# Altium PCB KSP_PCB.PcbDoc (part 2 of 2)
Units mm, origin at the board's own origin, x right, y up, seen from the top; angles counter-clockwise.
Board outline 121 x 121 mm, 2 copper layers (Top Layer, Bottom Layer), stack 1.571 mm thick; 210 components, 141 nets, 724 pads, 132 vias.
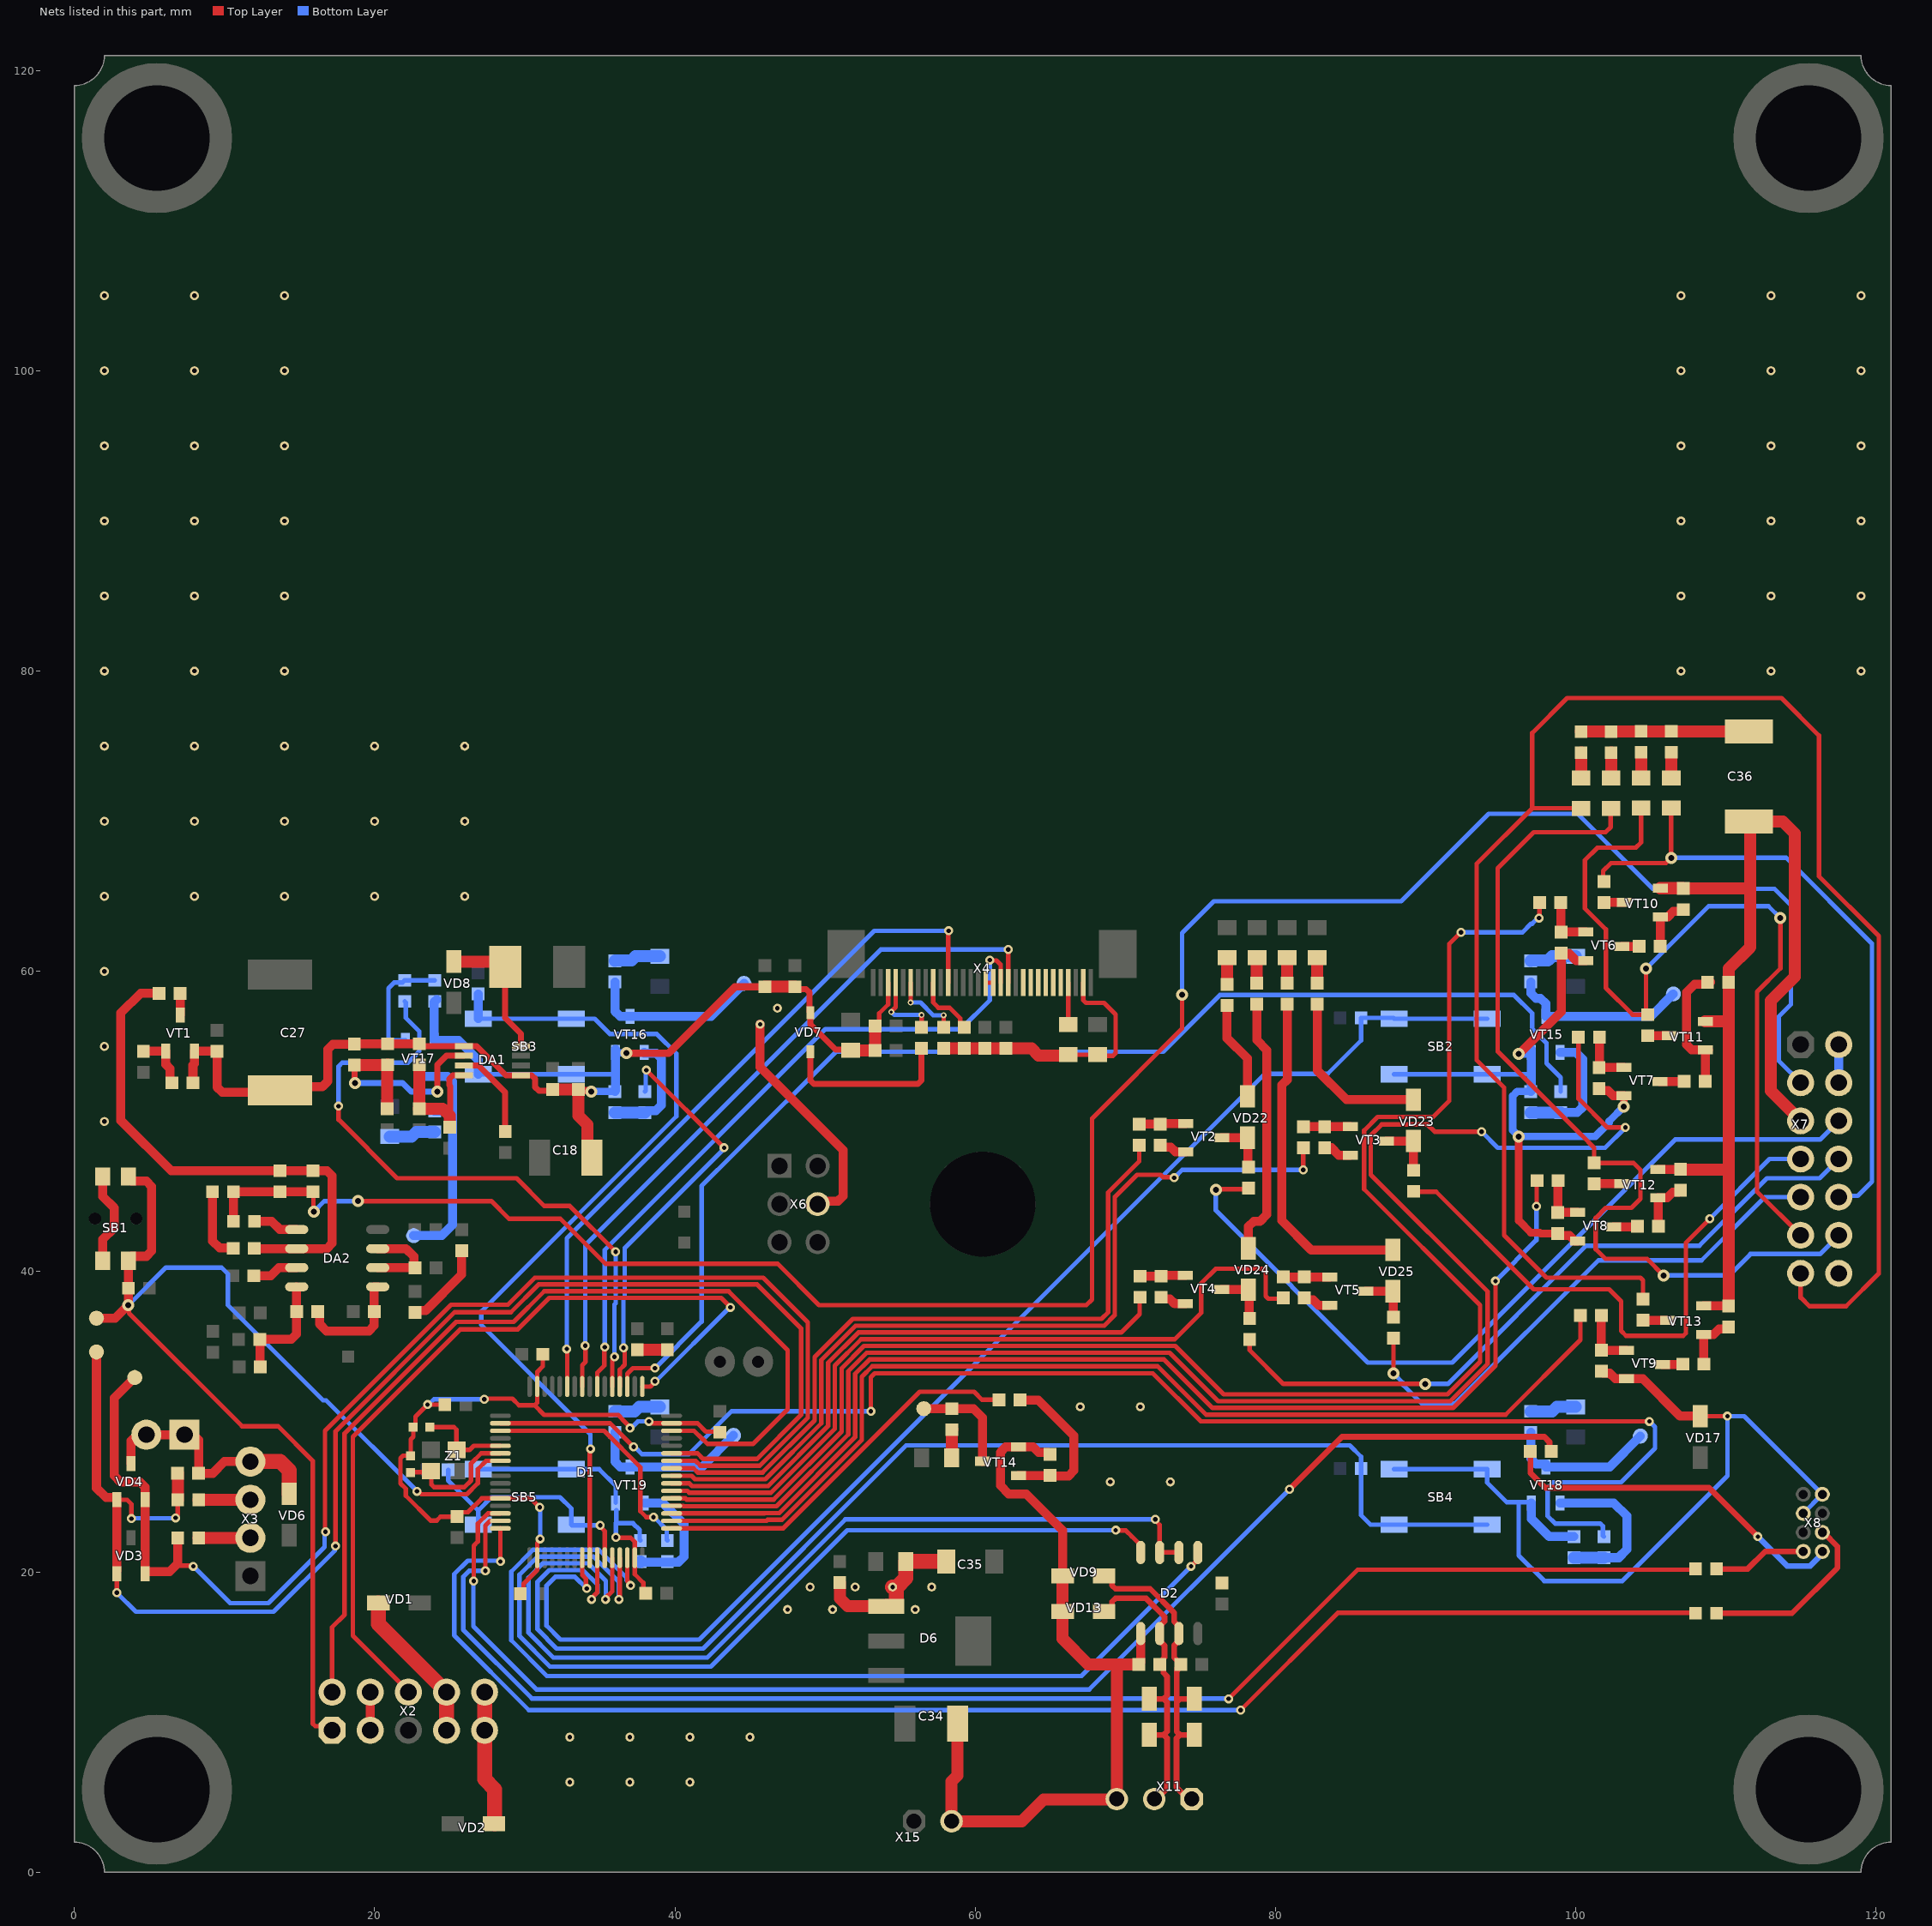
[diagram p2: the nets of this part, all layers, seen from the top]

## Via types
v1: diameter 0.6, hole 0.3, Top Layer to Bottom Layer, tented both sides, 85 vias
v2: diameter 0.8, hole 0.4, Top Layer to Bottom Layer, tented both sides, 42 vias
v3: diameter 0.4, hole 0.2, Top Layer to Bottom Layer, tented both sides, 4 vias
v4: diameter 0.6, hole 0.3, Top Layer to Bottom Layer, 1 vias

## Nets (pads, with @x,y where several pads share a name; then routed paths per layer and width w, separated by ;. In a path a pad name is that pad's centre, name@x,y a point inside that pad or via, vN(x,y) a via of type N, cw(c..) or ccw(c..) an arc to the next point about the centre after c; other vN are vias at no path point) (continued)
GND: C1.1 C2.1 C3.1 C4.1 C5.1 C6.1 C7.1 C8.1 C9.1 C10.1 C11.1 C12.1 C13.1 C14.1 C15.1 C16.1 C17.1 C18.2 C19.1 C20.1 C21.1 C22.1 C24.1 C25.1 C27.2 C28.1 C32.1 C33.1 C34.2 C35.2 C36.2 D1.12 D1.18 D1.31 D1.47 D1.63 D2.5 D6.1 DA1.1 DA1.5 DA2.4 pad.N@2,50 pad.N@2,55 pad.N@2,60 pad.N@2,65 pad.N@2,70 pad.N@2,75 pad.N@2,80 pad.N@2,85 pad.N@2,90 pad.N@2,95 pad.N@2,100 pad.N@2,105 pad.N@8,65 pad.N@8,70 pad.N@8,75 pad.N@8,80 pad.N@8,85 pad.N@8,90 pad.N@8,95 pad.N@8,100 pad.N@8,105 pad.N@14,65 pad.N@14,70 pad.N@14,75 pad.N@14,80 pad.N@14,85 pad.N@14,90 pad.N@14,95 pad.N@14,100 pad.N@14,105 pad.N@20,65 pad.N@20,70 pad.N@20,75 pad.N@26,65 pad.N@26,70 pad.N@26,75 pad.N@33,6 pad.N@33,9 pad.N@37,6 pad.N@37,9 pad.N@41,6 pad.N@41,9 pad.N@45,9 pad.N@45.675,56.475 pad.N@46.825,57.55 pad.N@47.5,17.5 pad.N@49,19 pad.N@50.5,17.5 pad.N@52,19 pad.N@54.5,19 pad.N@56,17.5 pad.N@57.1,19 pad.N@67,31 pad.N@69,26 pad.N@71,31 pad.N@73,26 pad.N@107,80 pad.N@107,85 pad.N@107,90 pad.N@107,95 pad.N@107,100 pad.N@107,105 pad.N@113,80 pad.N@113,85 pad.N@113,90 pad.N@113,95 pad.N@113,100 pad.N@113,105 pad.N@119,80 pad.N@119,85 pad.N@119,90 pad.N@119,95 pad.N@119,100 pad.N@119,105 R1.1 R4.2 R7.1 R8.1 R10.1 R12.2 R16.2 R17.1 R22.2 R23.2 R24.2 R26.2 R31.2 R43.2 R62.1 R63.1 R64.1 R65.1 R74.1 R75.1 R76.1 R77.1 R95.1 R100.1 R101.1 R111.1 R112.1 R113.1 SB1.2 SB2.2 SB3.2 SB4.2 SB5.2 VD4.3 VD6.1 VD7.2 VD9.1 VD13.1 VD17.1 VD26.2 VD27.2 VD28.2 VD29.2 VT1.3 VT2.3 VT3.3 VT4.3 VT5.3 VT6.3 VT7.3 VT8.3 VT9.3 VT14.3 VT15.3 VT16.3 VT17.3 VT18.3 VT19.3 X2.3 X2.4 X3.4 X4.2 X4.5 X4.6 X4.7 X4.8 X4.9 X4.10 X4.14 X4.15 X4.28 X5.1 X5.2 X6.4 X7.2 X7.4 X7.14 X8.2 X8.3 X11.3 X15.2 | length 429.8
  Top Layer w0.3: C1.1@22.4,27.725 22.375,27.75 21.901,27.75 21.725,27.574 21.725,25.9 22.075,25.55 22.075,25.075 23.725,23.425 24.137,23.425 24.387,23.675 25.625,23.675 25.625,23.825 25.775,23.975 26.214,23.975 27.139,24.9 D1.12@28.375,24.9 30.398,24.9 30.998,24.3 v1(31,24.3) ; C1.1@22.4,27.84 22.4,28.825 22.575,29 C4.1@22.575,29.65 22.725,29.8 22.725,30.35 v1(23.525,31.15) C8.1@24.675,31.15 ; v1(27.3,31.5) 27.35,31.55 29.165,31.55 29.615,31.1 30.649,31.1 ; C7.1@29.699,18.549 29.917,18.767 29.917,19.217 30.825,20.125 D1.18@30.825,20.95 30.825,21.919 31.025,22.119 v1(31.025,22.2) ; C3.1@31.2,34.5 31.2,33.7 30.825,33.325 D1.63@30.825,32.35 30.825,31.276 30.649,31.1 ; v4@36.1,22.25 36.132,22.282 37.042,22.282 37.325,21.999 D1.31@37.325,20.95 37.325,20.099 37.325,19.85 37.901,19.274 37.901,18.724 C6.1@38.05,18.575 ; v1(37,29.575) 37,29.656 36.518,30.138 36.518,30.157 36.221,30.454 31.295,30.454 30.649,31.1 ; v1(38.275,30.025) 38.356,30.025 38.481,29.9 D1.47@39.775,29.9 41.501,29.9 42.051,29.35 42.95,29.35 C5.1@43,29.3 ; C10.1@51.7,54.75 C10.1@51.725,54.725 ; C14.1@53.325,56.35 53.6,56.625 53.6,57.2 54.2,57.8 X4.28@54.2,59.25 ; X4.15@60.7,59.25 X4.14@61.2,59.25 ; C12.1@66.2,54.45 C11.1@68.15,54.45 68.225,54.375 69.174,54.375 69.35,54.551 69.35,57.125 68.575,57.9 67.376,57.9 67.2,58.076 X4.2@67.2,59.25 ; VD17.1@108.275,30.375 v1(110.1,30.375)
  Top Layer w0.4: R26.2@22.975,55.175 23.125,55.025 DA1.1@25.95,55.025 26.8,55.025 28.75,53.075 DA1.5@29.75,53.075 30.466,53.075 30.7,52.841 30.7,52.284 30.934,52.05 31.825,52.05 C24.1@31.85,52.075 ; C16.1@48,58.975 48.158,58.817 48.741,58.817 48.975,58.583 48.975,57.3 VD7.2@49.025,57.25 49.025,56.475 50.25,55.25 50.709,54.791 51.659,54.791 C10.1@51.7,54.75
  Top Layer w0.5: C20.1@33.575,52.05 33.582,52.057 34.368,52.057 v2(34.425,52) ; v2(36.775,54.55) 39.575,54.55 44,58.975 C17.1@46,58.975 ; v2(96.2,49) 96.2,43.4 97,42.6 97.6,42.6 97.66,42.54 R76.1@98.8,42.54 ; v2(103.2,51) VT7.3@103.2,51.715
  Top Layer w0.6: SB1.2@1.9,40.725 1.9,42.15 2.65,42.9 2.65,44.25 1.9,45 SB1.2@1.9,46.325 ; VD4.3@3.777,27.206 3.777,28.718 X5.2@4.2,29.141 ; X5.2@4.796,29.141 4.797,29.139 7.334,29.139 X5.1@7.336,29.141 ; X5.1@7.336,29.141 X5.1@7.336,29.141 ; R17.1@7.9,52.575 7.9,53.75 8,53.85 VT1.3@8,54.675 C22.1@9.5,54.675 9.5,52.301 9.851,51.95 13.575,51.95 C27.2@13.7,52.075 13.95,52.325 16.524,52.325 16.875,52.676 16.875,54.799 17.226,55.15 R12.2@18.65,55.15 18.662,55.163 20.862,55.163 C19.1@20.875,55.175 R26.2@22.975,55.175 ; R4.2@8.275,26.575 R4.2@8.283,26.575 ; C25.1@9.2,45.25 9.2,42.05 9.676,41.574 10.501,41.574 R16.2@10.575,41.5 ; X3.4@11.725,27.351 11.717,27.358 10.008,27.358 9.225,26.575 R4.2@8.283,26.575 ; R23.2@12.375,33.65 12.36,33.665 12.36,35.475 R24.2@12.344,35.491 14.449,35.491 14.8,35.842 R22.2@14.8,37.35 ; R22.2@14.7,37.375 14.808,37.483 DA2.4@14.808,38.994 ; X2.3@19.705,9.46 X2.4@19.705,12 ; C21.1@22.7,37.275 22.825,37.4 23.4,37.4 25.8,39.8 R31.2@25.8,41.4 ; pad.N@45.675,56.475 45.675,53.625 51.2,48.1 51.2,45.043 50.849,44.691 49.691,44.691 X6.4@49.5,44.5 ; R95.1@64.975,27.825 64.85,27.95 64.225,27.95 63.85,28.325 VT14.3@62.875,28.325 62.026,28.325 61.675,27.974 61.675,25.75 62.225,25.2 63.4,25.2 65.825,22.775 VD9.1@65.825,19.75 ; R43.2@70.9,13.85 71.025,13.975 71.025,14.85 71.02,15.005 D2.5@71.02,15.9 ; R62.1@72.325,48.425 72.45,48.3 73.025,48.3 73.35,47.975 VT2.3@74.025,47.975 ; R64.1@72.375,38.3 72.5,38.175 72.975,38.175 73.293,37.857 VT4.3@74.006,37.857 ; R65.1@81.925,38.25 81.951,38.276 81.951,38.224 82.05,38.125 82.5,38.125 82.875,37.75 VT5.3@83.625,37.75 ; R63.1@83.275,48.25 83.724,48.25 84.224,47.75 VT3.3@84.975,47.75 ; v2(96.2,54.5) 99.025,57.325 99.025,61.165 99.05,61.19 99.549,61.19 100.024,60.715 VT6.3@100.675,60.715 ; R76.1@98.8,42.54 98.925,42.415 99.574,42.415 99.925,42.064 99.925,42.04 VT8.3@100.125,42.04 ; R75.1@101.55,52.19 101.675,52.065 102.15,52.065 102.5,51.715 VT7.3@103.2,51.715 ; R77.1@101.7,33.365 101.825,33.24 102.25,33.24 102.625,32.865 VT9.3@103.375,32.865 104.46,32.865 106.95,30.375 VD17.1@108.275,30.375 ; X5.1@7.336,29.141 7.932,29.141 8.283,28.789 R4.2@8.283,26.575
  Top Layer w0.8: C24.1@31.85,52.125 C20.1@33.575,52.125 ; C20.1@33.575,52.05 33.575,50.4 34.175,49.8 34.175,47.9 C18.2@34.475,47.6 ; R1.1@37.5,34.8 C9.1@39.5,34.8 ; C17.1@46,58.975 C16.1@47.999,58.975 ; C33.1@50.975,19.3 51,19.275 51,18.225 51.5,17.725 54.05,17.725 D6.1@54.075,17.7 ; C10.1@51.725,54.725 C15.1@53.325,54.725 C14.1@53.325,56.35 ; C13.1@57.9,54.875 R7.1@62.05,54.875 63.75,54.875 64.225,54.4 66.15,54.4 C12.1@66.2,54.45 ; C34.2@58.825,9.9 58.825,6.431 58.425,6.031 X15.2@58.425,3.4 63.1,3.4 64.55,4.85 69.4,4.85 X11.3@69.425,4.875 69.425,13.85 ; VD9.1@65.825,19.75 VD13.1@65.825,17.375 65.825,15.55 67.525,13.85 69.425,13.85 ; R43.2@70.9,13.85 69.425,13.85 ; VD29.2@100.35,75.99 VD27.2@104.35,75.99 VD26.2@106.35,75.99 C36.2@110.8,75.99
  Top Layer w1: X3.4@11.725,27.351 13.714,27.351 14.3,26.765 VD6.1@14.3,25.2 ; D6.1@54.075,17.7 54.748,17.7 pad.N@54.748,18.848 ; pad.N@54.5,19 54.789,19 55.375,19.586 C32.1@55.375,20.7 C35.2@58.075,20.7
  Bottom Layer w0.3: v1(23.525,31.15) 23.606,31.15 23.956,31.5 v1(27.3,31.5) ; SB5.2@26.9,26.85 SB5.2@33.1,26.85 34.95,26.85 36.05,25.75 VT19.3@36.05,24.6 ; SB3.2@26.9,53.15 SB3.2@33.1,53.15 35.875,53.15 36.05,53.325 ; v1(31,24.3) 31.025,24.275 v1(31.025,22.2) ; v4(36.075,22.3) 36.075,23.244 37.206,23.244 37.651,22.799 37.651,22.149 R113.1@37.7,22.1 ; 36.1,23.194 VT19.3@36.1,24.116 ; v1(37,29.575) 37.081,29.575 37.531,30.025 v1(38.275,30.025) ; SB4.2@87.9,26.85 SB4.2@94.1,26.85 94.1,25.95 95.4,24.65 96.2,24.65 ; SB2.2@87.9,53.15 SB2.2@94.1,53.15 97,53.15 97.05,53.1 ; VT18.3@97.05,24.6 97,24.65 96.2,24.65 ; X8.3@115.15,23.905 X8.2@116.42,25.175 115.22,26.375 111.22,30.375 v1(110.1,30.375) 110.1,26.4 103.1,19.4 97.9,19.4 96.2,21.1 96.2,24.65
  Bottom Layer w0.5: v2(34.425,52) R101.1@36,52 ; VT16.3@36.05,54.6 36.075,54.575 36.75,54.575 v2(36.775,54.55) ; R100.1@97,52 96.093,52 95.8,51.707 95.8,49.4 v2(96.2,49) 101.3,49 102.221,49.921 102.221,50.021 v2(103.2,51)
  Bottom Layer w0.6: R111.1@24.125,58.125 R111.1@24,58 23.95,57.95 VT17.3@23.95,55.4 25.6,55.4 26.9,54.1 SB3.2@26.9,53.15 ; R101.1@36,52 36.05,52.05 36.05,53.325 VT16.3@36.05,54.6 VT16.3@36.05,54.8 ; v2(96.2,54.5) 96.238,54.538 VT15.3@97.05,54.538 ; R100.1@97,52 97.05,52.05 97.05,53.1 VT15.3@97.05,54.538 ; VT18.3@97.05,24.6 97.05,23.525 98.225,22.35 R112.1@99.874,22.35 ; VT15.3@97.05,54.8 VT15.3@97.05,54.6 VT15.3@97.05,54.538 ; X7.4@117.515,52.585 X7.2@117.515,55.125
IREF: R10.2 X4.22 | length 4.3
  Top Layer w0.3: X4.22@57.2,59.25 57.2,57.925 57.55,57.575 58.3,57.575 59,56.875 59,56.55 R10.2@59.275,56.275
KEY1: D1.24 R114.1 SB2.1 | length 89.2
  Top Layer w0.3: D1.24@33.825,20.95 33.825,19.8 34.068,19.557 34.068,18.957 v1(34.125,18.9)
  Bottom Layer w0.3: v1(34.125,18.9) 33.35,19.675 32.025,19.675 31.45,19.1 31.45,16.425 32.375,15.5 41.625,15.5 79.3,53.175 83.475,53.175 85.7,55.4 R114.1@85.7,56.9 87.85,56.9 SB2.1@87.9,56.85 SB2.1@94.1,56.85
KEY2: D1.25 R115.1 SB3.1 | length 57.8
  Top Layer w0.3: D1.25@34.325,20.95 34.325,28.15 v1(34.375,28.2)
  Bottom Layer w0.3: SB3.1@26.9,56.85 34.65,56.85 35.675,55.825 38.8,55.825 40.1,54.525 40.1,50.35 27.1,37.35 27.1,36.45 34.375,29.175 v1(34.375,28.2)
  Bottom Layer w0.6: SB3.1@26.9,56.85 R115.1@26.9,58.5
KEY3: D1.26 R116.1 SB4.1 | length 85.8
  Top Layer w0.3: v1(34.45,18.175) 34.45,18.256 34.825,18.631 D1.26@34.825,20.95
  Bottom Layer w0.3: v1(34.45,18.175) 34.45,18.251 34.85,18.651 34.85,19.15 33.875,20.125 31.625,20.125 30.85,19.35 30.85,16.175 32.125,14.9 41.875,14.9 55.4,28.425 84.95,28.425 85.7,27.675 R116.1@85.7,26.9 85.7,23.775 86.325,23.15 SB4.1@87.9,23.15 SB4.1@94.1,23.15
KEY4: D1.27 R117.1 SB5.1 | length 16.7
  Top Layer w0.3: v1(35.025,23.1) 35.025,23.019 35.325,22.719 D1.27@35.325,20.95
  Bottom Layer w0.3: R117.1@24.9,26.8 24.9,26.099 26.9,24.099 27.776,24.975 32.35,24.975 33.1,24.225 SB5.1@33.1,23.15 33.15,23.1 v1(35.025,23.1) ; SB5.1@26.9,23.15 26.9,24.175
KEY_LED1: D1.51 R98.2 | length 83.4
  Top Layer w0.3: D1.51@36.825,32.35 36.825,33.199 37.201,33.575 v1(38.675,33.575)
  Bottom Layer w0.3: v1(38.675,33.575) 41.775,36.675 41.775,45.7 44.025,47.95 50.725,54.65 72.525,54.65 76.3,58.425 95.875,58.425 97.1,57.2 97.1,56.175 97.375,55.9 98.05,55.225 98.05,53.875 99,52.925 R98.2@99,52
KEY_LED2: D1.52 R99.2 | length 27.6
  Top Layer w0.3: D1.52@36.325,32.35 36.325,33.475 36.65,33.8 36.65,34.725 36.632,34.743 36.632,34.868 v1(36.575,34.925) ; v1(38.1,53.425) v1(43.275,48.25)
  Bottom Layer w0.3: v1(36.575,34.925) 36.575,38.253 36.65,38.328 36.65,41.575 43.275,48.2 v1(43.275,48.25) ; R99.2@38,52 38.05,52.05 38.05,53.375 v1(38.1,53.425)
KEY_LED3: D1.53 R108.2 | length 44.2
  Top Layer w0.3: v1(17.6,51.025) 17.6,50.125 21.5,46.225 29.45,46.225 31.3,44.375 33,44.375 v1(36.05,41.325) ; D1.53@35.825,32.35 35.825,34.094 35.975,34.244 v1(35.975,34.325)
  Bottom Layer w0.3: v1(17.6,51.025) 17.6,53.674 17.851,53.925 22.225,53.925 22.975,54.675 22.975,56 22.076,56.899 22.076,57.924 R108.2@22,58 ; v1(35.975,34.325) 35.975,37.816 36.05,37.891 v1(36.05,41.325)
KEY_LED4: D1.2 R109.2 | length 99
  Top Layer w0.3: D1.2@28.375,29.9 35.675,29.9 v1(37.25,28.325) ; v1(53.05,30.7) 53.05,32.963 53.312,33.225 71.825,33.225 75.025,30.025 v1(104.9,30.025)
  Bottom Layer w0.3: v1(37.25,28.325) 37.331,28.325 37.806,27.85 40.925,27.85 43.775,30.7 v1(53.05,30.7) ; R109.2@101.874,22.35 101.801,22.423 101.801,23.049 101.625,23.225 98.625,23.225 98.125,23.725 98.125,25.6 98.5,25.975 103.025,25.975 105.275,28.225 105.275,29.65 v1(104.9,30.025)
KEY_LED5: D1.3 R110.2 | length 16.3
  Top Layer w0.3: D1.3@28.375,29.4 35.275,29.4 37.7,26.975 37.7,24.05 38.1,23.65 v1(38.575,23.65) v1@38.61,23.65
  Bottom Layer w0.3: v1(38.575,23.65) 38.61,23.65 39.46,22.799 39.46,22.14 R110.2@39.5,22.1
LCD_RES: D1.59 X4.20 | length 47.3
  Top Layer w0.3: v1(32.8,34.85) 32.825,34.825 D1.59@32.825,32.35 ; X4.20@58.2,59.25 58.2,62.675 v1(58.225,62.7)
  Bottom Layer w0.3: v1(32.8,34.85) 32.8,42.225 53.275,62.7 v1(58.225,62.7)
LED: D1.33 R94.2 | length 25.8
  Top Layer w0.3: D1.33@39.775,22.9 47.2,22.9 56.3,32 59.925,32 60.45,31.475 61.55,31.475 R94.2@61.575,31.45
LINE_A: D1.14 R102.2 | length 90
  Top Layer w0.3: v1(26.6,19.4) 26.6,21.75 26.875,22.025 26.875,23.223 27.552,23.9 D1.14@28.375,23.9
  Top Layer w0.4: v1(80.925,25.5) 84.425,29 97.899,29 98.25,28.649 98.25,28.15 R102.2@98.375,28.025
  Bottom Layer w0.3: v1(26.6,19.4) 26.575,19.375 26.575,16.375 30.775,12.175 67.6,12.175 v1(80.925,25.5)
LINE_A_P: R102.1 X8.8 | length 23.9
  Top Layer w0.381: R102.1@96.975,28.025 96.975,26.6 97.975,25.6 108.875,25.6 v1(112.125,22.35)
  Bottom Layer w0.381: v1(112.125,22.35) 114.075,20.4 115.623,20.4 116.42,21.197 X8.8@116.42,21.365
LINE_B: D1.15 R103.2 | length 97
  Top Layer w0.3: v1(27.375,20.075) 27.375,23.086 27.689,23.4 D1.15@28.375,23.4 ; v1(76.875,11.55) 85.475,20.15 R103.2@108.11,20.15
  Bottom Layer w0.3: v1(27.375,20.075) 26.3,20.075 25.9,19.675 25.9,16.15 30.475,11.575 76.85,11.575 v1(76.875,11.55)
LINE_B_P: R103.1 X8.7 | length 6.3
  Top Layer w0.381: R103.1@109.375,20.2 111.452,20.2 112.617,21.365 X8.7@115.15,21.365
LINE_Z: D1.16 R104.2 | length 97.3
  Top Layer w0.3: v1(28.375,20.7) D1.16@28.375,22.9 ; v1(77.675,10.8) 84.15,17.275 R104.2@108.096,17.275
  Bottom Layer w0.3: v1(28.375,20.7) 28.325,20.75 26.2,20.75 25.3,19.85 25.3,15.775 30.275,10.8 v1(77.675,10.8)
LINE_Z_P: R104.1 X8.6 | length 12.1
  Top Layer w0.381: R104.1@109.431,17.25 114.4,17.25 117.425,20.275 117.425,21.7 116.49,22.635 X8.6@116.42,22.635
MODBUS_N: D2.6 R38.1 R43.1 R50.1 VD13.2 X11.2 | length 20.6
  Top Layer w0.381: VD13.2@68.575,17.375 68.803,17.375 69.113,17.685 69.113,18.022 69.336,18.245 71.386,18.245 72.608,17.023 72.608,16.708 72.29,16.39 D2.6@72.29,15.9 72.29,15.41 72.608,15.092 72.608,14.308 72.535,14.235 72.535,14.084 R43.1@72.3,13.85 72.535,13.615 72.535,13.29 72.782,13.043 72.782,11.773 72.559,11.55 ; R38.1@71.6,9.15 72.559,9.15 ; R50.1@71.6,11.55 72.559,11.55 ; X11.2@71.925,4.875 72.072,4.875 72.775,5.578 72.775,8.934 72.559,9.15 ; 72.559,9.15 72.782,9.373 72.782,11.327 72.559,11.55
MODBUS_P: D2.7 R38.2 R42.1 R50.2 VD9.2 X11.1 | length 21.9
  Top Layer w0.381: VD9.2@68.575,19.75 68.803,19.75 69.113,19.441 69.113,19.103 69.336,18.88 71.649,18.88 73.243,17.286 73.243,16.708 73.56,16.39 D2.7@73.56,15.9 73.56,15.41 73.243,15.092 73.243,14.307 R42.1@73.7,13.85 73.466,13.615 73.466,13.44 73.417,13.392 73.417,11.327 ; X11.1@74.425,4.875 74.178,4.875 73.41,5.643 73.41,8.927 73.633,9.15 73.641,9.15 ; R38.2@74.6,9.15 73.641,9.15 ; R50.2@74.6,11.55 73.641,11.55 73.417,11.327 ; 73.417,11.327 73.417,9.373 73.641,9.15
MODBUS_RX: D1.30 D2.1 | length 66.6
  Top Layer w0.3: D1.30@36.825,20.95 36.825,19.406 37.05,19.181 v1(37.05,19.1) ; v1(74.375,20.375) 74.377,20.375 74.83,20.828 D2.1@74.83,21.3
  Bottom Layer w0.3: v1(37.05,19.1) 37.05,19.181 36.775,19.456 36.775,19.625 34.925,21.475 30.55,21.475 29.1,20.025 29.1,15.45 31.475,13.075 67.075,13.075 v1(74.375,20.375)
MODBUS_TRE: D1.28 D2.2 D2.3 | length 63.7
  Top Layer w0.3: v1(35.375,18.175) 35.375,18.256 35.825,18.706 D1.28@35.825,20.95 ; v1(72,23.5) 72,23.419 72.282,23.136 72.282,21.308 D2.3@72.29,21.3 D2.2@73.56,21.3
  Bottom Layer w0.3: v1(35.375,18.175) 35.4,18.2 35.4,19.4 34.225,20.575 31.2,20.575 30.25,19.625 30.25,15.95 31.9,14.3 42.15,14.3 51.35,23.5 v1(72,23.5)
MODBUS_TX: D1.29 D2.4 | length 62.7
  Top Layer w0.3: v1(36.275,18.175) 36.325,18.225 D1.29@36.325,20.95 ; v1(69.355,22.779) 69.377,22.758 70.037,22.758 70.425,22.37 71.02,21.775 D2.4@71.02,21.3
  Bottom Layer w0.3: v1(36.275,18.175) 36.275,19.325 34.575,21.025 30.85,21.025 29.65,19.825 29.65,15.725 31.675,13.7 42.4,13.7 51.479,22.779 v1(69.355,22.779)
MOSI: D1.57 X4.12 | length 48.1
  Top Layer w0.3: D1.57@33.825,32.35 33.825,33.775 34.05,34 34.05,35.05 v1(34.025,35.075) ; X4.12@62.2,59.25 v1(62.2,61.45)
  Bottom Layer w0.3: v1(34.025,35.075) 34.025,41.775 53.7,61.45 v1(62.2,61.45)
NetC1_2: C1.2 D1.6 Z1.3 | length 8.6
  Top Layer w0.3: C1.2@22.4,26.65 22.475,26.65 23.6,26.65 23.675,26.65 Z1.3@23.75,26.725 23.775,26.7 23.775,25.826 23.951,25.65 25.978,25.65 26.425,26.097 26.425,27.225 27.1,27.9 D1.6@28.375,27.9
NetC4_2: C4.2 D1.5 Z1.1 | length 6.2
  Top Layer w0.3: C4.2@23.675,29.65 25.274,29.65 25.45,29.474 Z1.1@25.45,28.125 26.325,28.125 26.6,28.4 D1.5@28.375,28.4
NetC19_2: C19.2 DA1.2 R11.2 R12.1 | length 15.9
  Top Layer w0.4: R12.1@18.65,53.75 18.675,53.725 18.675,52.575 v2(18.7,52.55) ; v2(24.175,52) 24.175,53.775 24.775,54.375 DA1.2@25.95,54.375
  Top Layer w0.8: R12.1@18.65,53.75 18.662,53.763 20.862,53.763 C19.2@20.875,53.775 ; R11.2@20.825,50.85 20.825,53.725 C19.2@20.85,53.75
  Bottom Layer w0.4: v2(18.7,52.55) 21.875,52.55 22.425,52 v2(24.175,52)
NetC23_2: C23.2 DA2.2 R16.1 R19.1 R20.2 | length 35.6
  Top Layer w0.6: R19.1@5.65,58.525 5.625,58.55 4.425,58.55 3.1,57.225 3.1,50.075 6.45,46.725 C23.2@15.869,46.725 ; R16.1@12.009,41.534 DA2.2@14.808,41.534 16.824,41.534 17.175,41.885 17.175,46.374 16.824,46.725 C23.2@15.9,46.725
NetC26_1: C26.1 DA1.4 R25.2 R26.1 | length 10.2
  Top Layer w0.4: C26.1@25,49.625 25.025,49.65 25.025,52.375 24.975,52.425 24.975,52.841 25.209,53.075 DA1.4@25.95,53.075
  Top Layer w0.8: R25.2@22.95,50.85 24.531,50.85 25,50.381 C26.1@25,49.625 ; R25.2@22.95,50.875 22.975,50.875 R26.1@22.975,53.775
NetDA1_3: DA1.3 R18.2 | length 6.1
  Top Layer w0.4: DA1.3@25.95,53.725 26.925,53.725 28.7,51.95 R18.2@28.7,49.325
NetDA1_8: DA1.8 L1.1 VD8.1 | length 9.3
  Top Layer w0.4: L1.1@28.7,60.3 28.7,56.9 29.75,55.85 DA1.8@29.75,55.025
  Top Layer w0.8: VD8.1@25.275,60.65 28.35,60.65 L1.1@28.7,60.3
NetDA2_1: DA2.1 R21.2 | length 3
  Top Layer w0.6: R21.2@12,43.35 13.15,43.35 13.696,42.804 DA2.1@14.808,42.804
NetDA2_3: DA2.3 R15.1 | length 3.1
  Top Layer w0.6: R15.1@11.95,39.725 13.075,39.725 13.614,40.264 DA2.3@14.808,40.264
NetDA2_5: DA2.5 R22.1 R27.2 | length 7.7
  Top Layer w0.6: R22.1@16.2,37.35 16.325,37.225 16.325,36.525 16.8,36.05 19.624,36.05 19.975,36.401 R27.2@19.975,37.35 19.975,38.994 DA2.5@20.208,38.994
NetDA2_6: DA2.6 DA2.7 R14.2 | length 5.8
  Top Layer w0.6: DA2.6@20.208,40.264 22.614,40.264 22.625,40.275 22.625,41 22.091,41.534 DA2.7@20.208,41.534 ; R14.2@22.65,40.3 R14.2@22.675,40.325
NetR3_1: R3.1 VD5.1 | length 1.9
  Top Layer w0.8: R3.1@58.425,27.6 58.45,27.625 58.45,29.45 VD5.1@58.475,29.475
NetR5_1: R5.1 X3.3 | length 3.4
  Top Layer w0.8: R5.1@8.283,24.806 8.285,24.808 11.722,24.808 X3.3@11.725,24.811
NetR6_1: R6.1 X3.2 | length 3.4
  Top Layer w0.8: R6.1@8.283,22.266 8.285,22.268 11.722,22.268 X3.2@11.725,22.271
NetR9_1: R9.1 VD7.1 | length 11.7
  Top Layer w0.4: VD7.1@49.025,54.65 49.025,52.734 49.259,52.5 56.191,52.5 56.425,52.734 R9.1@56.425,54.875
NetR13_1: R13.1 R17.2 VT1.1 | length 3.8
  Top Layer w0.6: R13.1@4.6,54.675 VT1.1@6.1,54.675 6.1,53.8 6.375,53.525 6.375,52.7 R17.2@6.5,52.575
NetR19_2: R19.2 VT1.2 | length 1.4
  Top Layer w0.6: VT1.2@7.05,57.075 R19.2@7.05,58.525
NetR54_1: R54.1 VD18.1 | length 1.8
  Top Layer w0.8: VD18.1@76.775,59.125 R54.1@76.775,60.925
NetR55_1: R55.1 VD19.1 | length 1.7
  Top Layer w0.8: VD19.1@82.775,59.225 R55.1@82.775,60.925
NetR56_1: R56.1 VD20.1 | length 1.7
  Top Layer w0.8: VD20.1@78.75,59.225 R56.1@78.75,60.925
NetR57_1: R57.1 VD21.1 | length 1.7
  Top Layer w0.8: VD21.1@80.775,59.225 R57.1@80.775,60.925
NetR58_1: R58.1 R62.2 VT2.1 | length 3.1
  Top Layer w0.6: R58.1@70.925,49.825 R62.2@72.325,49.825 72.375,49.875 VT2.1@74.025,49.875
NetR59_1: R59.1 R63.2 VT3.1 | length 3.1
  Top Layer w0.6: R59.1@81.85,49.65 R63.2@83.275,49.65 84.775,49.65 VT3.1@84.975,49.65
NetR60_1: R60.1 R64.2 VT4.1 | length 3.1
  Top Layer w0.6: R60.1@70.975,39.7 R64.2@72.375,39.7 72.432,39.757 VT4.1@74.006,39.757
NetR61_1: R61.1 R65.2 VT5.1 | length 3.1
  Top Layer w0.6: R61.1@80.525,39.65 R65.2@81.925,39.65 83.425,39.65 VT5.1@83.625,39.65
NetR66_2: R66.2 VD22.2 VT2.2 | length 3.7
  Top Layer w0.6: VT2.2@76.425,48.925 VD22.2@78.125,48.925 78.163,48.888 78.163,47.012 R66.2@78.2,46.975
NetR67_2: R67.2 VD23.2 VT3.2 | length 3.8
  Top Layer w0.6: VT3.2@87.375,48.7 VD23.2@89.175,48.7 89.188,48.688 89.188,46.762 R67.2@89.2,46.75
NetR68_2: R68.2 VD24.2 VT4.2 | length 3.8
  Top Layer w0.6: VT4.2@76.406,38.807 78.193,38.807 VD24.2@78.2,38.8 78.238,38.763 78.238,36.913 R68.2@78.275,36.875
NetR69_2: R69.2 VD25.2 VT5.2 | length 3.5
  Top Layer w0.6: VT5.2@86.025,38.7 VD25.2@87.825,38.7 87.838,38.688 87.838,36.988 R69.2@87.85,36.975
NetR70_1: R70.1 R74.2 VT6.1 | length 3.6
  Top Layer w0.6: R74.2@99,62.563 R70.1@99,64.538 ; R74.2@99.025,62.615 100.475,62.615 VT6.1@100.675,62.615
NetR71_1: R71.1 R75.2 VT7.1 | length 3.6
  Top Layer w0.6: R71.1@101.575,55.615 101.575,53.615 VT7.1@103.2,53.615
NetR72_1: R72.1 R76.2 VT8.1 | length 3.5
  Top Layer w0.6: R72.1@98.825,46.065 98.812,46.053 98.812,43.953 R76.2@98.8,43.94 99.925,43.94 VT8.1@100.125,43.94
NetR73_1: R73.1 R77.2 VT9.1 | length 4
  Top Layer w0.6: R73.1@101.7,37.09 R77.2@101.7,34.765 103.175,34.765 VT9.1@103.375,34.765
NetR78_1: R78.1 R82.2 VT10.1 | length 3.7
  Top Layer w0.6: R78.1@105.625,61.665 VT10.1@105.625,63.64 106.149,63.64 106.5,63.991 107.026,63.991 R82.2@107.15,64.115
NetR78_2: R78.2 VT6.2 | length 1.1
  Top Layer w0.6: VT6.2@103.075,61.665 R78.2@104.225,61.665
NetR79_1: R79.1 R83.2 VT11.1 | length 9.1
  Top Layer w0.6: R79.1@108.625,52.665 VT11.1@108.625,54.765 ; VT11.1@108.825,54.789 108.825,54.765 VT11.1@108.625,54.765 ; R83.2@108.975,59.275 108.85,59.15 107.925,59.15 107.375,58.6 107.375,55.116 107.726,54.765 VT11.1@108.625,54.765
NetR79_2: R79.2 VT7.2 | length 1.6
  Top Layer w0.6: VT7.2@105.6,52.665 R79.2@107.225,52.665
NetR80_1: R80.1 R84.2 VT12.1 | length 3.6
  Top Layer w0.6: VT12.1@105.475,44.915 VT12.1@105.487,44.915 ; R80.1@105.5,43.015 105.487,43.028 VT12.1@105.487,44.915 ; R84.2@106.975,45.415 106.85,45.29 106.462,45.29 106.087,44.915 VT12.1@105.487,44.915
NetR80_2: R80.2 VT8.2 | length 1.6
  Top Layer w0.6: VT8.2@102.525,42.99 R80.2@104.075,42.99
NetR81_1: R81.1 R85.2 VT13.1 | length 3.8
  Top Layer w0.6: R81.1@108.525,33.84 VT13.1@108.525,35.815 109.174,35.815 109.549,36.19 110.05,36.19 R85.2@110.175,36.315
NetR81_2: R81.2 VT9.2 | length 1.4
  Top Layer w0.6: VT9.2@105.775,33.815 106.151,33.815 106.164,33.802 107.087,33.802 R81.2@107.125,33.84
NetR86_2: R86.2 VT10.2 | length 1.4
  Top Layer w0.6: R86.2@101.875,64.59 VT10.2@103.225,64.59
NetR87_2: R87.2 VT11.2 | length 1.4
  Top Layer w0.6: R87.2@104.8,55.715 VT11.2@106.225,55.715
NetR88_2: R88.2 VT12.2 | length 1.8
  Top Layer w0.6: R88.2@101.25,45.865 VT12.2@103.075,45.865
NetR89_2: R89.2 VT13.2 | length 1.7
  Top Layer w0.6: R89.2@104.475,36.765 105.925,36.765 VT13.2@106.125,36.765
NetR90_1: R90.1 VD26.1 | length 1.7
  Top Layer w0.8: R90.1@106.35,72.89 VD26.1@106.35,74.59
NetR91_1: R91.1 VD27.1 | length 1.7
  Top Layer w0.8: R91.1@104.35,72.89 VD27.1@104.35,74.59
NetR92_1: R92.1 VD28.1 | length 1.7
  Top Layer w0.8: R92.1@102.35,72.865 VD28.1@102.35,74.565
NetR93_1: R93.1 VD29.1 | length 1.7
  Top Layer w0.8: R93.1@100.35,72.865 VD29.1@100.35,74.565
NetR94_1: R94.1 R95.2 VT14.1 | length 10.8
  Top Layer w0.6: VT14.1@62.875,26.425 63.075,26.425 R95.2@64.975,26.425 65,26.4 66.224,26.4 66.575,26.751 66.575,29.075 64.2,31.45 R94.1@62.975,31.45
NetR96_1: R96.1 VD30.1 | length 3.1
  Bottom Layer w0.8: VD30.1@97,60.7 97.025,60.725 98.15,60.725 98.425,61 R96.1@100,61
NetR97_1: R97.1 VD31.1 | length 3.1
  Bottom Layer w0.8: VD31.1@36,60.7 36.025,60.725 37.1,60.725 37.375,61 R97.1@39,61
NetR98_1: R98.1 R100.2 VT15.1 | length 8.5
  Bottom Layer w0.6: VT15.1@98.95,54.6 100,54.6 100.45,54.15 100.45,50.951 100.099,50.6 R98.1@99,50.6
  Bottom Layer w0.8: R100.2@97,50.6 R98.1@99,50.6
NetR99_1: R99.1 R101.2 VT16.1 | length 7.8
  Bottom Layer w0.6: VT16.1@37.95,54.6 37.95,54.55 38.749,54.55 39.1,54.199 39.1,51.101 38.724,50.725 38.125,50.725 R99.1@38,50.6
  Bottom Layer w0.8: R101.2@36,50.6 R99.1@38,50.6
NetR105_1: R105.1 VD32.1 | length 3.1
  Bottom Layer w0.8: R105.1@21,49 22.475,49 22.775,49.3 VD32.1@24,49.3
NetR106_1: R106.1 VD33.1 | length 3.1
  Bottom Layer w0.8: VD33.1@97,30.7 98.425,30.7 98.725,31 R106.1@100,31
NetR107_1: R107.1 VD34.1 | length 3.1
  Bottom Layer w0.8: VD34.1@36,30.7 37.325,30.7 37.625,31 R107.1@39,31
NetR108_1: R108.1 R111.2 VT17.1 | length 7.8
  Bottom Layer w0.3: R108.1@21.997,59.397 21.851,59.251 21.301,59.251 20.925,58.875 20.925,55.576 21.101,55.4 VT17.1@22.05,55.4 ; R108.1@22,59.4 R111.2@24,59.4
NetR109_1: R109.1 R112.2 VT18.1 | length 10.8
  Bottom Layer w0.6: VT18.1@98.95,24.6 102.525,24.6 103.4,23.725 103.4,21.5 102.85,20.95 R109.1@101.874,20.95
  Bottom Layer w0.8: R112.2@99.874,20.95 R109.1@101.874,20.95
NetR110_1: R110.1 R113.2 VT19.1 | length 8.5
  Bottom Layer w0.6: R113.2@37.75,20.675 37.763,20.663 39.05,20.663 40.249,20.663 40.6,21.014 40.6,23.199 39.199,24.6 VT19.1@37.95,24.6
  Bottom Layer w0.8: R113.2@37.7,20.7 R113.2@37.725,20.675
NetTP4_0: TP4.0 VD5.2 VT14.2 | length 7.2
  Top Layer w0.6: TP4.0@56.39,30.875 VD5.2@58.45,30.875 ; VD5.2@58.475,30.875 59.875,30.875 60.475,30.275 VT14.2@60.475,27.375
NetTP5_0: TP5.0 VD30.2 VT15.2 | length 12
  Bottom Layer w0.6: VD30.2@97,59.3 97,58.551 97.351,58.2 97.649,58.2 98,57.849 VT15.2@98,57 105,57 TP5.0@106.5,58.5
NetTP6_0: TP6.0 VD31.2 VT16.2 | length 11.6
  Bottom Layer w0.6: VD31.2@36,59.3 36,57.351 36.351,57 VT16.2@37,57 42.4,57 TP6.0@44.6,59.2
NetTP7_0: TP7.0 VD32.2 VT17.2 | length 16.1
  Bottom Layer w0.6: TP7.0@22.6,42.4 24.475,42.4 25.2,43.125 25.2,51.051 ; VT17.2@23,53 24.849,53 25.2,52.649 25.2,51.051 ; VD32.2@24,50.7 24.849,50.7 25.2,51.051
NetTP8_0: TP8.0 VD33.2 VT18.2 | length 10.2
  Bottom Layer w0.6: VD33.2@97,29.3 97,27.551 97.351,27.2 98,27.2 VT18.2@98,27 102.249,27 TP8.0@104.3,29.051
NetTP9_0: TP9.0 VD34.2 VT19.2 | length 10.9
  Bottom Layer w0.6: VD34.2@36,29.3 36,27.351 36.351,27 VT19.2@37,27 41.8,27 TP9.0@43.9,29.1
NetVD1_1: VD1.1 X2.7 X2.8 | length 10.6
  Top Layer w1: VD1.1@20.25,17.95 20.25,16.535 X2.8@24.785,12 ; X2.7@24.785,9.46 X2.8@24.785,12.216
NetVD2_1: VD2.1 X2.9 X2.10 | length 9.1
  Top Layer w1: X2.10@27.325,12.093 X2.9@27.325,9.46 27.325,6.2 28,5.525 VD2.1@28,3.225
NetVD18_2: VD18.2 VD22.1 | length 6.6
  Top Layer w0.6: VD18.2@76.775,57.725 76.775,55.55 78.125,54.2 VD22.1@78.125,51.675
NetVD19_2: VD19.2 VD23.1 | length 11.6
  Top Layer w0.6: VD19.2@82.775,57.825 82.775,53.4 84.725,51.45 VD23.1@89.175,51.45
NetVD20_2: VD20.2 VD24.1 | length 17.3
  Top Layer w0.6: VD24.1@78.2,41.55 78.2,42.999 78.551,43.35 78.975,43.35 79.425,43.8 79.425,54.75 78.75,55.425 VD20.2@78.75,57.825
NetVD21_2: VD21.2 VD25.1 | length 22.8
  Top Layer w0.6: VD21.2@80.775,57.825 80.775,52.775 80.425,52.425 80.425,43.4 82.375,41.45 VD25.1@87.825,41.45
RK_HIGH_1: R86.1 R90.2 X7.10 | length 43.2
  Top Layer w0.3: R86.1@101.875,65.99 101.826,66.039 101.826,66.689 102.351,67.215 105.999,67.215 v2(106.35,67.566) R90.2@106.35,70.89
  Bottom Layer w0.3: v2(106.35,67.566) 114.009,67.566 119.725,61.85 119.725,46 118.775,45.05 117.6,45.05 X7.10@117.515,44.965
RK_HIGH_2: R87.1 R91.2 X7.11 | length 56.2
  Top Layer w0.3: R91.2@104.35,70.89 104.35,68.591 103.999,68.24 101.44,68.24 100.6,67.4 100.6,64.2 102,62.8 102,58.899 103.784,57.115 104.675,57.115 R87.1@104.8,57.115 104.675,57.24 v2@104.675,60.121 ; v2(113.625,63.55) 113.625,60.2 112.075,58.65 112.075,45.325 X7.11@114.975,42.425
  Bottom Layer w0.3: v2(104.675,60.175) 108.845,64.345 112.83,64.345 v2(113.625,63.55)
RK_HIGH_3: R88.1 R92.2 X7.12 | length 61
  Top Layer w0.3: R92.2@102.35,70.865 102.35,70.69 102.325,70.665 102.325,69.616 101.974,69.265 97.2,69.265 94.8,66.865 94.8,54.665 100.365,49.1 100.375,49.1 101.225,48.25 R88.1@101.225,47.24 103.835,47.24 104.3,46.775 104.3,44.85 103.7,44.25 102,44.25 101.325,43.575 101.325,41.5 101.975,40.85 104.75,40.85 v2(105.85,39.75)
  Bottom Layer w0.3: v2(105.85,39.75) 110.21,39.75 111.635,41.175 116.265,41.175 X7.12@117.515,42.425
RK_HIGH_4: R89.1 R93.2 X7.13 | length 117.3
  Top Layer w0.3: R93.2@100.35,70.865 97.1,70.865 ; R89.1@104.475,38.165 104.475,39.424 104.299,39.6 98.05,39.6 95.225,42.425 95.225,52.265 93.4,54.09 93.4,67.165 97.1,70.865 ; X7.13@114.975,39.885 114.975,38.275 115.55,37.7 118,37.7 120.175,39.875 120.175,62.35 116.2,66.325 116.2,75.7 113.7,78.2 99.425,78.2 97.1,75.875 97.1,70.865
RK_HIGH_UPR_1: D1.37 R70.2 | length 106.1
  Top Layer w0.3: D1.37@39.775,24.9 40.695,24.9 40.77,24.825 45.855,24.825 46.58,24.825 51.1,29.345 51.1,33.558 52.592,35.05 73.325,35.05 76.55,31.825 91.452,31.825 93.626,33.999 93.626,37.767 85.9,45.493 85.9,49.4 86.8,50.3 90.5,50.3 91.575,51.375 91.575,61.825 v1(92.35,62.6) ; v1(97.55,63.55) 97.575,63.575 97.575,64.565 R70.2@97.6,64.59
  Bottom Layer w0.3: v1(92.35,62.6) 96.45,62.6 97.025,63.175 97.094,63.175 97.469,63.55 v1(97.55,63.55)
RK_HIGH_UPR_2: D1.36 R71.2 | length 108.3
  Top Layer w0.3: D1.36@39.775,24.4 40.559,24.4 40.584,24.375 46.766,24.375 51.55,29.159 51.55,33.372 52.778,34.6 72.95,34.6 76.175,31.375 91.639,31.375 94.125,33.861 94.125,38.676 86.35,46.451 86.35,49.075 87.075,49.8 90.122,49.8 90.597,49.325 v1(93.725,49.325) ; R71.2@100.175,55.615 100.175,51.525 102.1,49.6 v1(103.3,49.6)
  Bottom Layer w0.3: v1(93.725,49.325) 94.8,48.25 101.95,48.25 v1(103.3,49.6)
RK_HIGH_UPR_3: D1.35 R72.2 | length 77.6
  Top Layer w0.3: D1.35@39.775,23.9 45.964,23.9 45.989,23.925 46.228,23.925 46.953,23.925 52,28.972 52,33.186 52.964,34.15 72.575,34.15 75.8,30.925 91.825,30.925 94.65,33.75 v1(94.65,39.375) ; v1(97.375,44.35) 97.4,44.375 97.4,46.04 R72.2@97.425,46.065
  Bottom Layer w0.3: v1(94.65,39.375) 97.375,42.1 v1(97.375,44.35)
RK_HIGH_UPR_4: D1.34 R73.2 | length 72.3
  Top Layer w0.3: D1.34@39.775,23.4 46.1,23.4 46.175,23.475 46.414,23.475 47.139,23.475 52.45,28.786 52.45,32.999 53.151,33.7 72.15,33.7 75.375,30.475 95.325,30.475 100.3,35.45 R73.2@100.3,37.09
RK_LOW_1: R66.1 X7.6 | length 56
  Top Layer w0.3: v2@76.063,45.488 R66.1@78.113,45.488
  Top Layer w0.6: v2(76.025,45.45) v2@76.063,45.488 ; R66.1@78.113,45.488 R66.1@78.2,45.575
  Bottom Layer w0.3: v2(76.025,45.45) 76.025,44.075 86.15,33.95 91.775,33.95 106.625,48.8 116.27,48.8 X7.6@117.515,50.045
RK_LOW_2: R67.1 X7.7 | length 39.3
  Top Layer w0.3: R67.1@89.2,45.35 89.225,45.325 90.699,45.325 97.199,38.825 102.225,38.825 103.025,38.025 103.025,36.05 103.35,35.725 107.149,35.725 107.325,35.901 107.325,41.925 v1(108.925,43.525)
  Bottom Layer w0.3: v1(108.925,43.525) 112.905,47.505 X7.7@114.975,47.505
RK_LOW_3: R68.1 X7.8 | length 47.1
  Top Layer w0.3: R68.1@78.274,35.474 78.274,34.776 80.525,32.525 v2(89.975,32.525)
  Bottom Layer w0.3: v2(89.975,32.525) 91.475,32.525 100.675,41.725 108.225,41.725 112.725,46.225 116.235,46.225 X7.8@117.515,47.505
RK_LOW_4: R69.1 X7.9 | length 36.1
  Top Layer w0.3: v2(87.863,33.225) 87.856,33.231 87.856,35.458 R69.1@87.912,35.513
  Top Layer w0.6: R69.1@87.85,35.575 R69.1@87.912,35.513
  Bottom Layer w0.3: v2(87.863,33.225) 88.501,32.587 88.501,32.449 89.725,31.225 91.975,31.225 101.5,40.75 108.375,40.75 112.59,44.965 X7.9@114.975,44.965
RK_LOW_UPR_1: D1.41 R58.2 | length 48.1
  Top Layer w0.3: D1.41@39.775,26.9 41.241,26.9 41.516,26.625 45.109,26.625 45.834,26.625 49.3,30.091 49.3,34.304 51.846,36.85 68.411,36.85 68.85,37.289 68.85,45.276 70.925,47.351 R58.2@70.925,48.425
RK_LOW_UPR_2: D1.40 R59.2 | length 59.4
  Top Layer w0.3: D1.40@39.775,26.4 41.104,26.4 41.329,26.175 45.296,26.175 46.021,26.175 49.75,29.904 49.75,34.118 52.032,36.4 68.597,36.4 69.3,37.103 69.3,44.975 70.775,46.45 72.344,46.45 72.494,46.3 73.2,46.3 v1(73.244,46.256) ; v1(81.85,46.775) R59.2@81.85,48.25
  Bottom Layer w0.3: v1(73.244,46.256) 73.267,46.256 73.786,46.775 v1(81.85,46.775)
RK_LOW_UPR_3: D1.39 R60.2 | length 39.6
  Top Layer w0.3: D1.39@39.775,25.9 40.968,25.9 41.143,25.725 46.207,25.725 50.2,29.718 50.2,33.931 52.219,35.95 69.725,35.95 70.95,37.175 70.95,38.275 R60.2@70.975,38.3
RK_LOW_UPR_4: D1.38 R61.2 | length 52.4
  Top Layer w0.3: D1.38@39.775,25.4 40.832,25.4 40.957,25.275 45.668,25.275 46.393,25.275 50.65,29.532 50.65,33.745 52.405,35.5 73.3,35.5 75.05,37.25 75.05,39.225 76.025,40.2 79.174,40.2 79.35,40.024 79.35,38.376 79.526,38.2 80.475,38.2 R61.2@80.525,38.25
RX: D1.43 R4.1 R5.2 TP3.0 VD3.1 VD4.1 | length 101.8
  Top Layer w0.3: v1(2.825,18.625) 2.826,18.626 VD3.1@2.827,19.866 VD3.1@2.827,19.866 VD3.1@2.827,20.066 ; VD4.1@2.827,24.806 3.519,24.806 3.8,24.525 v1(3.8,23.55) ; v1(6.75,23.6) 6.75,23.681 6.883,23.814 R5.2@6.883,24.806 ; v1(17.4,21.725) 17.4,29.375 25.325,37.3 29.075,37.3 30.925,39.15 45.475,39.15 48.4,36.225 48.4,30.464 45.461,27.525 41.889,27.525 41.514,27.9 D1.43@39.775,27.9
  Top Layer w0.6: TP3.0@1.475,34.65 1.475,25.6 2.112,24.963 2.827,24.963 VD4.1@2.827,24.806 VD3.1@2.827,20.066
  Top Layer w0.8: R5.2@6.883,24.806 6.892,24.814 R4.1@6.892,26.575
  Bottom Layer w0.3: v1(2.825,18.625) 4.1,17.35 13.275,17.35 17.343,21.418 17.343,21.668 v1(17.4,21.725) ; v1(3.8,23.55) 3.825,23.575 6.725,23.575 v1(6.75,23.6)
SCK: D1.55 X4.13 | length 46.6
  Top Layer w0.3: D1.55@34.825,32.35 34.825,33.275 35.3,33.75 35.3,34.95 v1(35.325,34.975) ; v1(60.975,60.75) 60.993,60.732 61.418,60.732 61.7,60.45 X4.13@61.7,59.25
  Bottom Layer w0.3: v1(35.325,34.975) 35.325,41.449 50.026,56.15 59.05,56.15 60.975,58.075 v1(60.975,60.75)
SPEED_CONTROL: C23.1 C25.2 R20.1 R21.1 X7.3 | length 149.7
  Top Layer w0.3: C23.1@15.9,45.325 15.925,45.3 15.925,44.025 v2(15.95,44) ; v2(18.9,44.7) 27.775,44.7 28.95,43.525 32.375,43.525 35.375,40.525 46.85,40.525 49.6,37.775 67.4,37.775 67.775,38.15 67.775,50.2 73.775,56.2 v2(73.775,58.45)
  Top Layer w0.6: R21.1@10.6,43.35 10.6,45.281 10.644,45.325 R20.1@13.7,45.325 C23.1@15.9,45.325
  Bottom Layer w0.3: v2(15.95,44) 16.65,44.7 v2(18.9,44.7) ; v2(73.775,58.45) 73.775,62.55 75.9,64.675 88.375,64.675 94.2,70.5 100.125,70.5 105.125,65.5 113.225,65.5 114.325,64.4 114.325,57.8 113.525,57 113.525,54.035 X7.3@114.975,52.585
SWCLK: D1.49 X2.6 | length 56.3
  Top Layer w0.3: X2.6@22.572,11.728 18.55,15.75 18.55,29 25.7,36.15 29.525,36.15 31.625,38.25 43.075,38.25 v1(43.7,37.625) ; D1.49@37.825,32.35 38.361,32.35 38.675,32.664 v1(38.675,32.7)
  Bottom Layer w0.3: v1(38.675,32.7) 38.725,32.7 43.65,37.625 v1(43.7,37.625)
SWDIO: D1.46 X2.2 | length 65.6
  Top Layer w0.3: X2.2@17.165,12 17.165,16.315 18,17.15 18,29.225 25.425,36.65 29.25,36.65 31.3,38.7 43.575,38.7 47.5,34.775 47.5,30.836 45.189,28.525 42.18,28.525 41.855,28.85 41.818,28.85 41.268,29.4 D1.46@39.775,29.4
TX: D1.42 R6.2 TP2.0 VD3.3 VD4.2 | length 94
  Top Layer w0.3: 6.742,20.417 7.883,20.417 v1(7.925,20.375) ; v1(16.725,22.675) 16.7,22.7 16.7,29.4 25.1,37.8 28.875,37.8 30.675,39.6 45.875,39.6 48.85,36.625 48.85,30.277 45.648,27.075 44.923,27.075 41.702,27.075 41.377,27.4 D1.42@39.775,27.4
  Top Layer w0.6: TP2.0@4.025,32.95 2.65,31.575 2.65,26.425 3.075,26 4.376,26 4.727,25.649 VD4.2@4.727,24.806 4.727,20.066 4.727,20.016 6.341,20.016 6.742,20.417 6.883,20.558 R6.2@6.883,22.266
  Bottom Layer w0.3: v1(7.925,20.375) 10.375,17.925 12.925,17.925 16.668,21.668 16.668,22.618 v1(16.725,22.675)
uC_RES: D1.7 R2.1 SB1.1 TP1.0 X2.1 | length 84.4
  Top Layer w0.3: v2(3.6,37.775) 3.651,37.724 3.651,37.224 11.175,29.7 13.575,29.7 15.875,27.4 15.875,9.908 16.051,9.732 17.365,9.732 X2.1@17.638,9.46 ; v1(22.825,25.375) 22.906,25.375 23.106,25.175 26.139,25.175 26.875,25.911 26.875,26.85 27.425,27.4 D1.7@28.375,27.4
  Top Layer w0.6: TP1.0@1.475,36.9 2.725,36.9 v2(3.6,37.775) R2.1@3.6,38.9 SB1.1@3.6,40.725 ; SB1.1@3.6,40.825 3.8,41.025 4.799,41.025 5.15,41.376 5.15,45.674 4.799,46.025 3.8,46.025 3.6,46.225 SB1.1@3.6,46.325
  Bottom Layer w0.3: v2(3.6,37.775) 6.1,40.275 9.8,40.275 10.225,39.85 10.225,37.775 16.565,31.435 16.765,31.435 v1(22.825,25.375)
Vcc_RK: C36.1 R82.1 R83.1 R84.1 R85.1 VT10.3 VT11.3 VT12.3 VT13.3 X7.5 | length 70.7
  Top Layer w0.6: VT12.3@105.475,46.815 R84.1@106.975,46.815 ; VT13.3@108.525,37.715 R85.1@110.175,37.715
  Top Layer w0.8: VT10.3@105.625,65.54 107.125,65.54 R82.1@107.15,65.515 111.625,65.515 ; R84.1@106.975,46.815 107,46.79 110.175,46.79 ; VT11.3@108.625,56.665 110.025,56.665 ; R85.1@110.175,37.715 110.175,46.79 ; C36.1@111.2,69.865 111.625,69.44 111.625,65.515 ; C36.1@111.525,69.99 111.54,69.975 113.781,69.975 114.575,69.181 114.575,59.65 112.975,58.05 112.975,52.045 X7.5@114.975,50.045 ; 110.175,46.79 110.175,56.665 R83.1@110.175,59.275 110.2,59.3 110.2,60.175 111.625,61.6 111.625,65.515
VCOMH: C12.2 X4.4 | length 2.5
  Top Layer w0.3: C12.2@66.2,56.775 66.2,58.5 X4.4@66.2,59.25
VDD: C13.2 X4.25 | length 4.7
  Top Layer w0.3: v3(55.7,57.925) 55.7,58.5 X4.25@55.7,59.25 ; C13.2@57.9,56.275 v3(57.9,57.075)
  Bottom Layer w0.3: v3(55.7,57.925) 56.35,57.925 57.2,57.075 v3(57.9,57.075)
VSL: R9.2 X4.27 | length 5
  Top Layer w0.3: v3(54.404,57.296) 54.404,57.324 54.7,57.62 X4.27@54.7,59.25 ; R9.2@56.425,56.275 v3(56.425,57.1)
  Bottom Layer w0.3: v3(54.404,57.296) 54.431,57.296 54.627,57.1 v3(56.425,57.1)
pads on no net: C18. C27. C34. C35. C36. D1. D1.1@28.675,32.05 D1.4 D1.8 D1.44 D1.45 D1.50 D1.54 D1.62 D2.28 D6. DA1. DA2.28 SB1.360 SB1.N VD1. VD2. VD3. VD4. VD6. VD7.5 VD8. VD9. VD13. VD17. VD22. VD23. VD24. VD25. VT1. VT2. VT3. VT4. VT5. VT6. VT7. VT8. VT9. VT10. VT11. VT12. VT13. VT14. VT15. VT16. VT17. VT18. VT19. X2.5 X4.1 X4.11 X4.21 X4.23 X4.30 X4.N X6.6 X7.38 X8.4 X8.5 X11.28 X15.23 X15.24 Z1.2 Z1.4 Z1.5 Z1.6
copper on no net: | length 64.6
  Top Layer w0.3: 18.225,34.35 v1(19.1,34.35) ; v1(26.925,29.275) 27.3,28.9 28.375,28.9 ; 39.775,28.4 41.65,28.4 42.075,27.975 45.275,27.975 47.95,30.65 47.95,35.2 v1(45.375,37.775) ; 39.775,28.9 38.025,28.9 37.65,29.275 37.65,30.624 37.826,30.8 38.475,30.8 39.388,31.713 40.039,32.364 v1(40.675,33) ; 40.625,41.925 40.85,41.9 42.425,41.9 v1(42.45,41.875) ; 40.628,44.006 41.5,44 v1(42.55,44)
  Bottom Layer w0.3: v1(19.1,34.35) 20.725,35.975 24.175,35.975 28.05,32.1 28.05,30.4 v1(26.925,29.275) ; v1(40.675,33) 41.25,33.575 41.25,33.698 41.25,34.3 44.35,37.4 44.35,38.801 42.45,40.701 v1(42.45,41.875) ; v1(42.55,44) 42.55,43.1 43.05,42.6 43.05,40.998 44.875,39.173 44.875,38.275 v1(45.375,37.775)

## Polygon pours and split planes (outlines as drawn)
GND on Top Layer "GND_L01_P005" (solid, remove dead copper, pour order 5): 0,0 0,19.25 0,121 121,121 121,0
3.3V on Top Layer "3.3V_L01_P004" (solid, pour order 4): 60,22.5 59.5,22 59.5,19 57,16.5 43,16.5 42.5,17 28.5,17 26,19.5 26,23 23,23 20.65,25.35 20.65,29.15 23.5,32 25.5,32 26.5,33 27.5,34 29.5,34 29.5,34.5 32.5,37.5 35.5,37.5 41,37.5 44,34.5 44,32.5 43.5,32 41.5,32 41,31.5 41,30.5 41.525,29.975 45.375,29.975 47,31.6 47,36 43,40 32,40 30.5,38.5 28.425,38.5 19,29.075 19,22.125 26.625,14.5 50,14.5 57,14.5 59,12.5 61.5,12.5 62,13 62,22 61.5,22.5
GND on Top Layer "GND_L01_P002" (solid, pour order 2): 45,65.75 73,65.75 73,55.5 70.225,52.725 48.025,52.725 45,55.75
5V on Top Layer "5V_L01_P000" (solid, pour order 0): 45,7 51.5,13.5 55.5,13.5 56.5,12.5 56.5,0.55 45,0.55
GND on Bottom Layer "GND_L02_P006" (solid, remove dead copper, pour order 6): 0,0 0,121 121,121 121,0

## Silkscreen, mask and mechanical layers (free items; w line width, h text height)
Top Overlay:
  drawing of 7 lines, arcs and shapes, not listed
  text "PA11" at 36.325,43.45 h1
  text "PA12" at 36.35,41.525 h1
  text "Enc" at 46.1,39.4 h1.2
  text "Inverter" at 111.475,33.275 h1.2
  text "PC15" at 16.625,32.425 h1
  text "Linear Enc" at 113.25,16.575 h1.2
  text "Prog" at 33.2,12.925 h1.2
  text "KSP.01-v02 08.2024" at 82.2,3.2 h2.5
  text "Power" at 48.475,1.025 h1.2
  text "GND" at 66.35,0.25 h1.2
  text "+5V" at 53.4,0.225 h1.2
  text "GND" at 58.7,0.15 h1.2
  text "MDB_N" at 69.875,0.05 h1.2
  text "MDB_P" at 74.7,0.05 h1.2
Bottom Overlay:
  drawing of 7 lines, arcs and shapes, not listed